# Altium PCB CS_JFETOnSemiSOT23_v1.PcbDoc
Units mm, origin at the board's own origin, x right, y up, seen from the top; angles counter-clockwise.
Board outline 40.01 x 8 mm, 2 copper layers (Top Layer, Bottom Layer); 28 components, 11 nets, 62 pads, 4 vias.
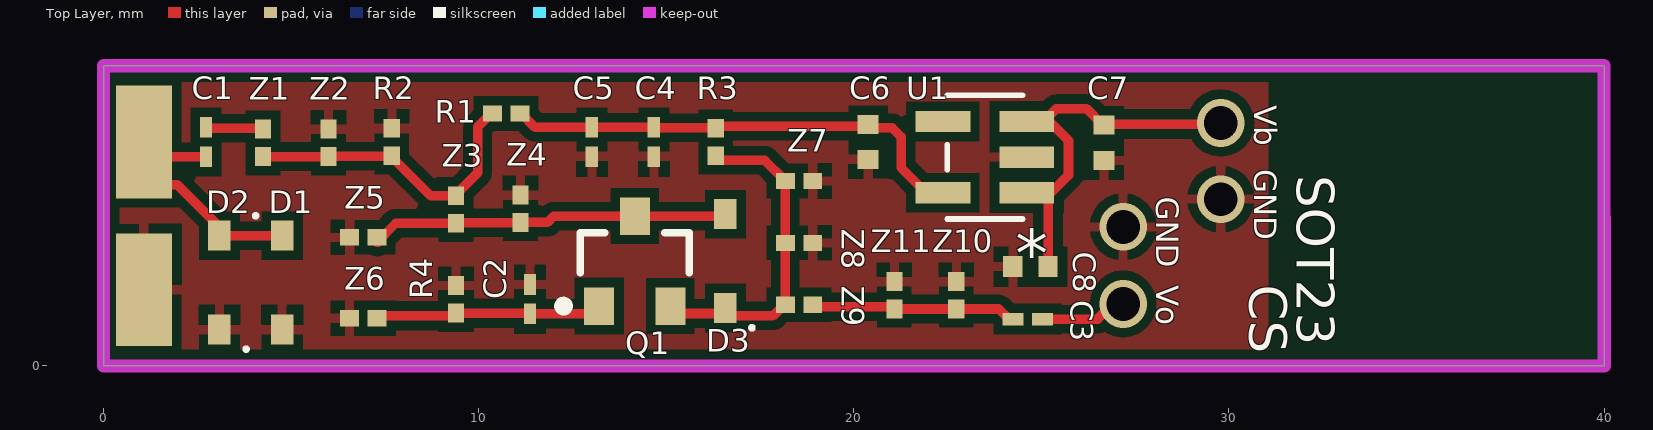
[diagram p0: Top Layer view]
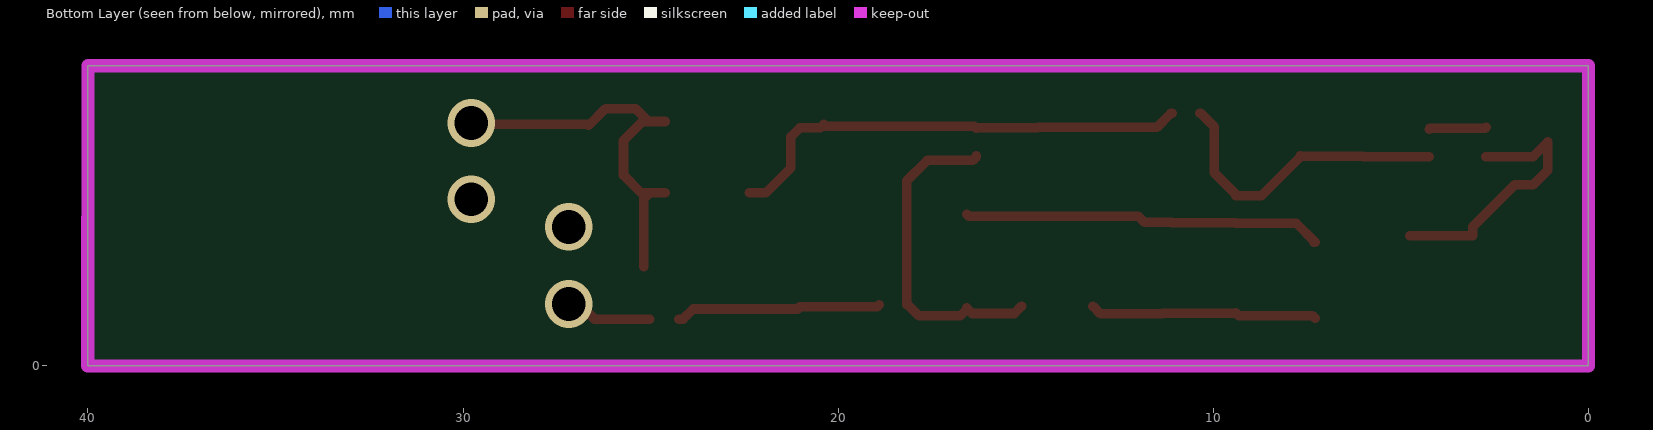
[diagram p1: Bottom Layer view, seen from below]

## Layer stack, top to bottom
Top Solder: solder mask 0.0102, Solder Resist, Dk 3.5
Top Layer: signal copper 0.0356
Dielectric 1: dielectric 0.32, FR-4, Dk 4.8
Bottom Layer: signal copper 0.0356
Bottom Solder: solder mask 0.0102, Solder Resist, Dk 3.5

## Board outline
0,0 0,8 40,8 40.005,0

## Design rules (kind name [scope] priority, off if disabled: settings)
Clearance [All] p1: gap=0.254 ignorepadtopadclearanceinfootprint=FALSE except(0: Arc-Hole Track-Hole SMDPad-Hole THPad-Hole Via-Hole Fill-Hole Poly-Hole Region-Hole Text-Hole)
PolygonConnect [All] p1: connectstyle=Relief reliefconductorwidth=0.254 reliefentries=4 polygonreliefangle="90 Angle" airgapwidth=0.254
RoomDefinition CS_JFETOnSemiSOT23_v1 [InComponentClass('CS_JFETOnSemiSOT23_v1')] p1: confinementstyle=ConfineIn formatcopy=TRUE lockcomponents=FALSE outline 40.005,8.001 0,8.001 0,0 40.005,0
RoutingVias [All] p1: holewidth=0.711 width=1.27 viastyle="Through Hole" minholewidth=0.711 minwidth=1.27 maxholewidth=0.711 maxwidth=1.27
SolderMaskExpansion [All] p1: expansion=0.102
Width [All] p1: maxlimit=0.254 minlimit=0.254 preferedwidth=0.254
30 further rules are at their usual default settings.

## Components (designator, comment, footprint, x,y, rotation, side; value= is the part's Value field where it differs from the comment)
C1 "Cin" C0201 2.732,5.969 r90 top value=Value
C2 "" C0201 11.368,1.778 r270 top value=Value
C3 "" C0201 24.638,1.247 r0 top value=Value
C4 "" CAP_CBR_0201 14.67,5.969 r90 top value=Value
C5 "" CAP_CBR_0201 13.019,5.969 r90 top value=Value
C6 "" YAG_CC0402 20.385,5.969 r90 top value=Value
C7 "" YAG_CC0402 26.67,5.946 r90 top value=Value
C8 "" YAG_CC0402 24.709,2.644 r0 top value=Value
D1 "" INF-SOD323_V 4.764,2.224 r0 top
D2 "" INF-SOD323_V 3.09,2.224 r180 top
D3 "" INF-SOD323_V 16.575,2.794 r180 top
Q1 "2SK2394-6-TB-E" ONSC-CP-3-318AN_A_V 14.162,2.794 r90 top
R1 "" RES_RC0201_P6XP3 10.733,6.731 r0 top value=Value
R2 "" RES_RC0201_P6XP3 7.685,5.969 r270 top value=Value
R3 "" RES_RC0201_P6XP3 16.321,5.969 r90 top value=Value
R4 "" RES_RC0201_P6XP3 9.398,1.778 r270 top value=Value
U1 "" DBV5 23.495,5.565 r180 top value=Value
Z1 "" RES_RC0201_P6XP3 4.25,5.946 r270 top value=Value
Z2 "" RES_RC0201_P6XP3 5.998,5.946 r270 top value=Value
Z3 "" RES_RC0201_P6XP3 9.398,4.168 r270 top value=Value
Z4 "" RES_RC0201_P6XP3 11.114,4.191 r270 top value=Value
Z5 "" RES_RC0201_P6XP3 6.923,3.429 r0 top value=Value
Z6 "" RES_RC0201_P6XP3 6.923,1.27 r0 top value=Value
Z7 "" RES_RC0201_P6XP3 18.542,4.93 r180 top value=Value
Z8 "" RES_RC0201_P6XP3 18.542,3.279 r180 top value=Value
Z9 "" RES_RC0201_P6XP3 18.542,1.628 r0 top value=Value
Z10 "" RES_RC0201_P6XP3 22.733,1.882 r270 top value=Value
Z11 "" RES_RC0201_P6XP3 21.082,1.882 r270 top value=Value

## Footprints (in the part's own frame and the unit in brackets; to place one, negate y for a bottom-side part, rotate by r counter-clockwise, add the part's x,y. Pads: shape width x height; smd on the part's side, far side on the other; paste and mask are expansions set on the pad)
C0201 [mil]
  rect 21.78x13 smd paste+0 mask+0: 1(-15.39,0) 2(15.39,0)
  body extent 0,0 10,10, height 10
CAP_CBR_0201 [mil]
  rect 21.78x13 smd paste+0 mask+0: 1(-15.39,0) 2(15.39,0)
  body extent 0,0 10,10, height 10
DBV5 [mil]
  rect 57.56x22.36 smd paste+0 mask+0: 1(-44,37.4) 2(-44,0) 3(-44,-37.4) 4(44,-37.4) 5(44,37.4)
  silkscreen extent -40,-65 40,65, body extent 0,0 10,10, height 10
INF-SOD323_V [mm] "SOD, 2-Leads, Body 1.7x1.25 mm"
  rect 0.6x0.8 smd: 1(0,1.25) 2(0,-1.25)
  silkscreen extent -0.76,1.73 -0.66,1.83, body extent -0.63,-0.85 0.63,0.85, height 1.1
ONSC-CP-3-318AN_A_V [mm] "SOT23, 3-Leads, Body 2.9x1.5mm, Pitch 0.95mm"
  rect 1x0.8 smd: 1(-1.2,0.95) 2(-1.2,-0.95) 3(1.2,0)
  silkscreen extent -1.32,-1.45 0.75,2.02, body extent -0.75,-1.45 0.75,1.45, height 1.31
RES_RC0201_P6XP3 [mm]
  rect 0.503x0.43 smd paste+0 mask+0: 1(-0.366,0) 2(0.366,0)
  body extent 0,0 0.25,0.25, height 0.25
YAG_CC0402 [mil]
  rect 20x22 smd paste+0 mask+0: 1(-18.5,0) 2(18.5,0)
  body extent 0,0 10,10, height 10

## Part data
C1 C2 C3: library part C0201C270J3GACTU, "No Description Available", Built_By=EMA_UL_Team, Copyright="Copyright (C) 2018 Accelerated Designs. All rights reserved", Manufacturer_Part_Number=C0201C270J3GACTU, RefDes=RefDes, Type=DEV, Vendor=Kemet
C4 C5: library part CBR02C399C3GAC, "No Description Available", Built_By=EMA_UL_Team, Copyright="Copyright (C) 2018 Accelerated Designs. All rights reserved", Manufacturer_Part_Number=CBR02C399C3GAC, RefDes=RefDes, Type=DEV, Vendor=KEMET
C6 C7 C8: library part CC0402KRX7R9BB10, "No Description Available", Manufacturer_Part_Number=CC0402KRX7R9BB103, Built_By=EMA_UL_Team, Copyright="Copyright (C) 2018 Accelerated Designs. All rights reserved", RefDes=RefDes, Type=DEV, Vendor=Yageo
D1 D2 D3: library part BAT15-03W, "Single Silicon Schottky Diode, 110 mA IF Max, SOD32, Green", Manufacturer=Infineon, Supplier Part Number 1=N/A, ComponentLink1Description="Manufacturer URL", ComponentLink1URL=http://www.infineon.com/, ComponentLink2Description=Datasheet, ComponentLink2URL=http://www.infineon.com/dgdl/bat15series.pdf?folderId=db3a304314dca3890114ff6812070b44&fileId=db3a304314dca3890114ff6b74ca0b48&location=en.Products.RF.RF_Mixer___Detector_Schottky_Diodes.DATASHEET.bat15series.pdf, ComponentLink3Description="Package Specification", ComponentLink3URL=http://www.infineon.com/dgdl/SOD323-Package_Overview.pdf?folderId=db3a30431936bc4b011952aab84f3bbe&fileId=db3a30431936bc4b011952beed653be3, Configuration=Single, CT (typ)="0.26 pF", DatasheetVersion=Jun-2011, Green=yes, Group="RF Mixer", IF (max)="110 mA", Mounting Technology="Surface Mount", PackageDescription="2-Pin Small Outline Diode Package, 1.25 x 1.7 mm Body", PackageReference=SOD323, PartNumber=BAT15-03W, Supplier 1=Mouser, VF (typ)="0.23 V", VR (max)="4 V"
Q1: "N-Channel JFET, 15 V, 10 to 20 mA, 38 mS, 3-Pin CP, Pb-Free, Tape and Reel", Manufacturer="On Semiconductor", Supplier Part Number 1=2SK2394-6-TB-E-ND, Channel Polarity="N Channel", ComponentLink1Description="Manufacturer URL", ComponentLink1URL=http://www.onsemi.com/, ComponentLink2Description=Datasheet, ComponentLink2URL=http://www.onsemi.com/pub_link/Collateral/EN4839-D.PDF, ComponentLink3Description="Package Specification", ComponentLink3URL=http://www.onsemi.com/pub_link/Collateral/EN6619-D.PDF, IDSS Max (uA)=20000, IDSS Min (uA)=10000, Mounting Technology="Surface Mount", PackageDescription="3-Pin Small Outline Transistor, Body 2.9 x 1.5 mm, Pitch 0.95 mm", PackageReference=CP-3-318AN_A, Packing="Tape and Reel", PartNumber=2SK2394-6-TB-E, RoHS=Pb-Free, Supplier 1=Digi-Key, Supplier 2=Mouser, Supplier Part Number 2=863-2SK2394-6-TB-E
R1 R2 R3 R4 Z1 Z2 Z3 Z4 Z5 Z6 Z7 Z8 Z9 Z10 Z11: library part RC0201FR-0718KL, "No Description Available", Built_By=EMA_Anthony, Copyright="Copyright (C) 2018 Accelerated Designs. All rights reserved", Manufacturer_Part_Number=RC0201FR-0718KL, RefDes=RefDes, Type=DEV, Vendor=Yageo
U1: library part LP5907MFX-3.3/NO, "No Description Available", Manufacturer_Part_Number=LP5907MFX-3.3/NOPB, Built_By=EMA_UL_Team, Copyright="Copyright (C) 2018 Accelerated Designs. All rights reserved", RefDes=RefDes, Type=DEV, Vendor="Texas Instruments"

## Free pads (board coordinates)
  rect 1.5x3 smd: ""(1.081,2.032) ""(1.081,5.969)

## Via types
v1: diameter 1.27, hole 0.9, Top Layer to Bottom Layer, 4 vias

## Nets (pads, with @x,y where several pads share a name; then routed paths per layer and width w, separated by ;. In a path a pad name is that pad's centre, name@x,y a point inside that pad or via, vN(x,y) a via of type N, cw(c..) or ccw(c..) an arc to the next point about the centre after c; other vN are vias at no path point)
D: D3.1 Q1.2 R3.1 Z7.2 Z8.2 Z9.1 | length 8.9
  Top Layer w0.254: Q1.2 15.309,1.397 16.428,1.397 D3.1 16.575,1.507 16.748,1.334 17.845,1.334 18.14,1.628 Z9.1 Z8.2 Z7.2 17.628,5.479 16.409,5.479 16.321,5.567 R3.1
G: D3.2 Q1.3 Z3.2 Z4.2 Z5.2 | length 9.6
  Top Layer w0.254: Z5.2@7.325,3.302 7.289,3.302 7.789,3.803 Z3.2 9.409,3.814 11.103,3.814 Z4.2 11.834,3.825 12.003,3.994 Q1.3 16.525,3.994 D3.2
GND: C2.1 C4.1 C5.1 C6.1 C7.1 C8.1 D1.2 D2.1 pad.@1.081,2.032 R2.1 R4.1 U1.2 Z2.1 Z4.1 Z5.1 Z6.1 Z7.1 Z8.1 Z10.1 Z11.1
  other v1: 27.181,3.706 29.783,4.445
N1: C1.2 Z1.1 | length 1.5
  Top Layer w0.254: C1.2 2.756,6.336 4.226,6.336 Z1.1
N2: R1.1 R2.2 Z1.2 Z2.2 Z3.1 | length 8.2
  Top Layer w0.254: Z1.2 Z2.2 6.01,5.592 7.674,5.592 R2.2 7.685,5.567 8.717,4.534 Z3.1 9.398,4.571 9.971,5.144 9.971,6.371 10.331,6.731 R1.1
N3: C3.1 Z9.2 Z10.2 Z11.2 | length 5.5
  Top Layer w0.254: Z9.2 18.964,1.572 21.026,1.572 Z11.2 Z10.2 23.866,1.517 24.136,1.247 C3.1
S: C2.2 Q1.1 R4.2 Z6.2 | length 6.1
  Top Layer w0.254: Z6.2 7.36,1.341 9.327,1.341 R4.2 9.41,1.4 11.355,1.4 C2.2 13.005,1.387 Q1.1
Vbatt: C7.2 C8.2 U1.1 U1.3 | length 10.7
  Top Layer w0.254: U1.1 U1.1@25.021,4.615 ; U1.3 U1.3@25.06,6.515 ; C8.2 25.178,4.458 U1.1@25.021,4.615 ; v1@29.529,6.604 v1@29.614,6.604 ; v1(29.783,6.477) 29.753,6.447 26.7,6.447 C7.2 26.645,6.416 26.203,6.858 25.402,6.858 U1.3@25.06,6.515 ; U1.1@25.021,4.615 25.254,4.615 25.725,5.086 25.725,6.007 25.216,6.515 U1.3@25.06,6.515
Vcc: C4.2 C5.2 C6.2 R1.2 R3.2 U1.5 | length 12.7
  Top Layer w0.254: R1.2 11.135,6.731 11.506,6.36 C5.2 C4.2 14.682,6.347 16.308,6.347 R3.2 16.373,6.387 20.333,6.387 C6.2 20.474,6.35 21.02,6.35 21.265,6.104 21.265,5.28 21.93,4.615 U1.5
Vin: C1.1 D1.1 D2.2 pad.@1.081,5.969 | length 7.1
  Top Layer w0.254: C1.1 1.472,5.578 1.081,5.969 1.081,5.219 1.474,4.826 1.97,4.826 3.09,3.706 D2.2 D1.1
Vout: C3.2 | length 2.3
  Top Layer w0.254: C3.2 26.502,1.247 26.906,1.651 v1(27.181,1.651)
pads on no net: U1.4

## Polygon pours and split planes (outlines as drawn)
GND on Top Layer "Top Layer-No Net 1" (solid, pour order 0): -0.062,7.916 0.023,8.001 30.926,8.001 31.053,7.874 31.053,0.127 30.926,0 0.065,0 -0.062,0.127

## Keep-outs
Keep-Out Layer:
  the board outline again, w0.35

## Silkscreen, mask and mechanical layers (free items; w line width, h text height)
Top Overlay:
  text "Vb" at 30.672,6.954 h0.6 r270
  text "GND" at 30.672,5.245 h0.6 r270
  text "SOT23" at 31.815,5.08 h1 r270
  text "GND" at 28.07,4.505 h0.6 r270
  text "Vo" at 28.07,2.151 h0.6 r270
  text "CS" at 30.545,2.159 h1 r270

## Text inside footprints (layer, text, board x,y; h text height)
U1: Top Overlay "*" at 25.184,4.174 h1.27 r180; Mechanical 13 "*" at 24.435,5.14 h1.27 r180